# Altium PCB SOT-23_2021-11-22.pcbdoc
Units mm, origin at the board's own origin, x right, y up, seen from the top; angles counter-clockwise.
Board outline 29.61 x 29.2 mm, 2 copper layers (Top Layer, Bottom Layer); 1 components, 0 nets, 3 pads, 0 vias.
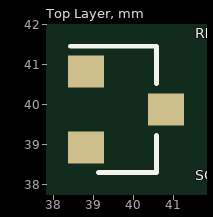
[diagram p0: Top Layer view]
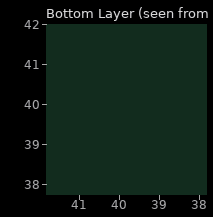
[diagram p1: Bottom Layer view, seen from below]

## Layer stack, top to bottom
Top Layer: signal copper (thickness not stored)
Dielectric: dielectric 0.32, FR-4, Dk 4.8
Bottom Layer: signal copper (thickness not stored)

## Board outline
55.013,25.4 25.4,25.4 25.4,54.604 55.013,54.604

## Components (designator, comment, footprint, x,y, rotation, side; value= is the part's Value field where it differs from the comment)
REF? "SOT-23" SOT-23 39.826,39.875 r0 top

## Footprints (in the part's own frame and the unit in brackets; to place one, negate y for a bottom-side part, rotate by r counter-clockwise, add the part's x,y. Pads: shape width x height; smd on the part's side, far side on the other; paste and mask are expansions set on the pad)
SOT-23 [mm]
  rect 0.9x0.8 smd: 1(-0.999,0.95) 2(-0.999,-0.95) 3(1.001,0)
  silkscreen extent -1.4,-1.58 0.76,1.58

## Nets (pads, with @x,y where several pads share a name; then routed paths per layer and width w, separated by ;. In a path a pad name is that pad's centre, name@x,y a point inside that pad or via, vN(x,y) a via of type N, cw(c..) or ccw(c..) an arc to the next point about the centre after c; other vN are vias at no path point)
pads on no net: REF?.1 REF?.2 REF?.3